# Allegro board AS2258_ASM235CM_BGA272_V2_0801.brd
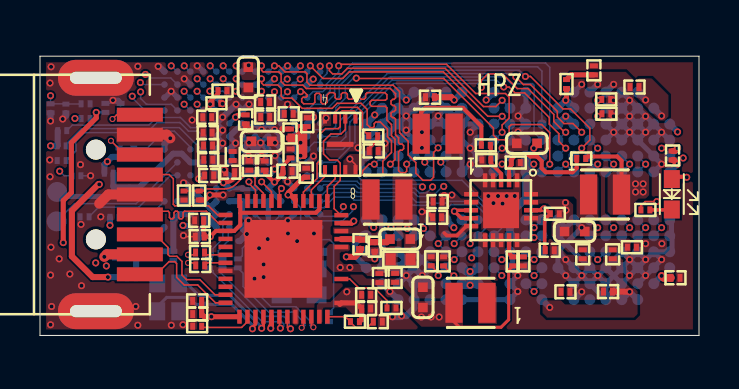
[diagram p0: board, top side]
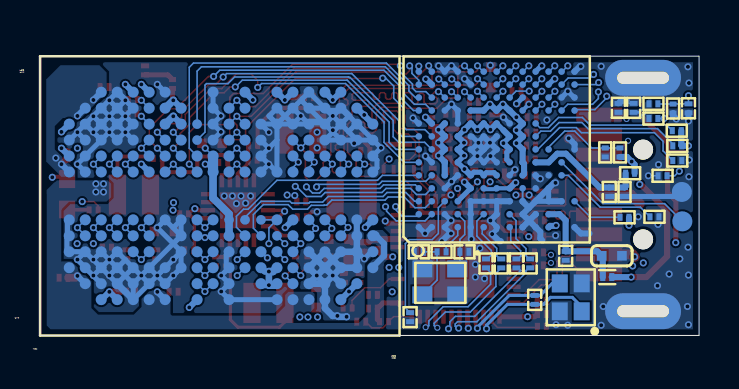
[diagram p1: board, bottom side, seen from below]

Outline 33 x 14 mm; copper layers: TOP, GND2, ART03, ART04, GND5, BOTTOM. Coordinates in mm from the lower left corner of the outline.
Outline path: 0,14 0,0 33,0 33,14 0,14

## Design rules (mm)
constraint set DEFAULT: min track width 0.076
net group DIFF_SATA_RX: nets SATA_RXN SATA_RXP
net group DIFF_SATA_TX: nets SATA_TXN SATA_TXP
net group DIFF_SRX_48: nets SRXN_48 SRXP_48
net group DIFF_STX_48: nets STXN_48 STXP_48
net group DIFF_UD_48: nets UDN_48 UDP_48
net group DIFF_URX_SW_2: nets URXN_SW_2 URXP_SW_2
net group DIFF_UTX_SW_2: nets UTXN_SW_2 UTXP_SW_2
net group DIFF_UTX_SW_2SW: nets UTXN_SW_2SW UTXP_SW_2SW
net group DIFFPAIR0: nets F0_DQS F0_DQSN
net group DIFFPAIR1: nets F1_DQS F1_DQSN

## Placement (name value [footprint] x y rotation side)
C1  100NF/0201  [0201C]  17.78 2.89 270 top
C2  100NF/0201  [0201C]  16.33 1.35 0 top
C3  100NF/0201  [0201C]  7.87 1.73 180 top
C4  10PF/50V  [0201C]  8.23 1.78 270 bottom
C5  100NF/0201  [0201C]  8 4.96 180 top
C6  100NF/0201  [0201C]  17 2.88 270 top
C7  100NF/0201  [0201C]  13.33 8.16 90 top
C8  1UF/10V  [0201C]  16.91 0.69 180 top
C9  100NF/0201  [0201C]  16.33 2.04 0 top
C10  4.7uF/10V  [0201C]  16.03 4.58 90 top
C11  10UF/6.3V  [0402C]  18.03 4.83 270 top
C12  2.2UF/10V  [0201C]  4.04 11.41 90 bottom
C13  100NF/0201  [0201C]  7.87 1.07 0 top
C14  100NF/0201  [0201C]  7.97 5.77 0 top
C15  100NF/0201  [0201C]  10.67 3.61 90 bottom
C16  100NF/0201  [0201C]  9.9 3.61 90 bottom
C17  100NF/0201  [0201C]  9.14 3.61 90 bottom
C18  100NF/0201  [0201C]  8.46 3.61 90 bottom
C19  100NF/0201  [0201C]  8.02 3.51 0 top
C20  100NF/0201  [0201C]  8.02 4.16 0 top
C21  22UF/16V/0402  [0402C]  26.77 5.21 90 top
C22  0.1UF/16V  [0201C]  3.27 11.41 270 bottom
C23  1UF/16V  [0201C]  0.53 11.39 270 bottom
C24  100NF/0201  [0201C]  16.71 9.25 0 top
C25  20PF/0201  [0201C]  11.75 4.19 180 bottom
C26  20PF/0201  [0201C]  14.03 4.19 0 bottom
C27  2.2uF  [0201C]  19.91 6.71 180 top
C28  2.2UF/0402  [0201C]  14.47 0.92 270 bottom
C29  1uF  [0201C]  25.52 4.27 0 top
C30  10uF  [0402C]  19.17 1.91 180 top
C31  10uF  [0402C]  11.1 9.73 270 top
C32  4.7UF/0402  [0201C]  10.49 8.51 90 top
C33  100NF/0201  [0201C]  9.52 8.18 180 top
C34  10uF  [0402C]  10.43 12.94 180 top
C35  4.7UF/0402  [0201C]  11.25 8.51 90 top
C36  100NF/0201  [0201C]  12.39 8.23 0 top
C37  100NF/0201_NC  [0201C]  12.45 11.11 0 top
C38  100NF/0201_NC  [0201C]  8.42 9.52 180 top
C39  10UF/0402  [0402C]  4.37 3.99 90 bottom
C40  100NF/0201  [0201C]  6.68 3.99 270 bottom
C41  100NF/0201_NC  [0201C]  12.52 10.12 270 top
C42  100NF/0201_NC  [0201C]  31.67 9.02 270 top
C43  100NF/0201_NC  [0201C]  28.67 4.07 270 top
C44  100NF/0201_NC  [0201C]  28.44 2.2 0 top
C45  100NF/0201_NC  [0201C]  27.18 4.07 270 top
C46  100NF/0201_NC  [0201C]  29.77 12.45 0 top
C47  2.2UF/0402  [0402C]  24.38 9.63 270 top
C48  2.2UF/0402  [0201C]  4.49 7.19 270 bottom
CB1  100nF  [0201C]  19.89 5.92 180 top
CB2  100nF  [0201C]  8.47 8.02 0 top
CB3  100nF  [0201C]  8.43 8.81 0 top
CB4  100nF  [0201C]  10.3 10.83 90 top
CB5  100nF  [0201C]  11.28 10.95 0 top
CB6  100nF  [0201C]  11.27 11.7 0 top
CB7  100nF  [0201C]  8.38 10.94 180 top
CB8  100nF  [0201C]  8.4 10.17 180 top
CB9  100nF  [0201C]  26.31 2.19 180 top
CB10  100nF  [0201C]  27.73 13.29 90 top
CB11  100nF  [0201C]  19.53 11.94 180 top
CB12  100nF  [0201C]  31.82 2.89 0 top
FB1  120 OHM 2A\0 OHM  [0603L]  9.65 9 270 top
FB2  120 OHM 2A\0 OHM  [0603L]  12.55 9.12 270 top
FB3  120 OHM 2A\0 OHM  [0603L]  4.6 2.93 0 bottom
J1  USB30_typeA  [USBA-12D00X18D9]  5 7.07 270 top
JP1  HEADER_2P  [TP4]  0.84 5.72 180 bottom
JP2  HEADER_2P  [TP4]  0.86 7.19 180 bottom
L1  4.7uH  [IND_VLS252010]  17.4 6.81 180 top
L2  GNR3015PM-3.3UH  [IND_VLS252010]  21.56 1.64 180 top
L3  GNR3015PM-3.3UH  [IND_VLS252010]  19.91 10.11 180 top
L4  GNR3015PM-3.3UH  [IND_VLS252010]  28.29 7.07 0 top
LED1  BLUE  [LED_2P_63X31_H16]  31.64 7.08 270 top
R1  1KOhm  [0201R-S]  30.31 6.29 0 top
R2  100KOhm  [0201R]  15.77 0.69 0 top
R3  12.1KOHM  [0201R]  7.87 0.46 180 top
R7  4.7KOhm  [0201R]  17.6 1.38 0 top
R8  47KOHM  [0201R]  2.28 11.61 0 bottom
R9  4.7KOhm  [0201R]  16.69 10.01 0 top
R10  100KOhm  [0201R]  1.3 11.38 90 bottom
R11  5.1K/0201  [0201R]  1.83 8.01 180 bottom
R13  510K  [0201R]  25.78 6.1 180 top
R14  453K  [0201R]  23.67 3.71 270 top
R15  90.9K  [0201R]  22.32 9.53 180 top
R16  100K  [0201R]  24.2 3.71 270 top
R17  100K  [0201R]  22.35 8.79 180 top
R19  200K  [0201R]  27.1 8.87 0 top
R20  100K  [0201R]  23.82 8.67 0 top
R21  2.4K/0201  [0201R]  9.14 12.27 180 top
R22  2.4K/0201  [0201R]  8.84 11.64 0 top
R23  2.4K/0201  [0201R]  26.36 12.6 270 top
R24  10K/0402  [0201R]  3.45 8.13 0 bottom
R25  100K/0201_NC  [0201R]  3.96 9.17 90 bottom
R26  100K/0201  [0201R]  4.7 9.17 270 bottom
R27  100K/0402  [0201R]  3.73 7.19 270 bottom
R28  100K/0201  [0201R]  1.09 9.5 0 bottom
R29  100K/0201  [0201R]  1.12 10.27 0 bottom
R30  100K/0201  [0201R]  1.09 8.77 180 bottom
R31  100K/0201  [0201R]  2.23 5.95 180 bottom
R32  100K/0201  [0201R]  3.73 5.92 0 bottom
R33  300/0201  [0201R]  20.21 3.71 90 top
R34  300/0201  [0201R]  28.35 11.83 180 top
R35  300/0201  [0201R]  19.59 3.72 90 top
R36  300/0201  [0201R]  28.36 11.11 180 top
R37  0/0402  [0201R]  12.89 4.19 180 bottom
R38  0/0402  [0201R]  13.38 10.69 270 top
R39  0/0402  [0201R]  2.28 10.88 180 bottom
R40  0Ohm  [0402R]  18.06 3.81 0 top
R41  0/0402  [0201R]  16.76 4.45 90 top
R42  0/0402  [0201R]  29.64 4.42 180 top
R43  47K/0201  [0201R]  7.97 7.01 270 top
R44  5.1K/0201  [0201R]  7.21 7.01 90 top
U3  W25X20CL USON(2x3mm)  [USON8_200X300H060]  15.03 9.58 180 top
U4  BGA169  [AS2258_9X9X1_2]  10.13 9.33 90 bottom
U5  RY1303  [QFN20_0R4]  23.09 6.28 270 top
U6  TMP_5  [BGA272_0R55]  24.61 7.04 90 bottom
U7  ASM235CM  [WD_QFN_48P_16_S236_PAD_12V]  12.19 3.84 270 top
X1  25Mhz  [XTAL_4P_126X98_HELE_H31]  6.42 1.91 90 bottom
Y1  30MHz-2520  [XTAL2520]  11.5 3.54 0 bottom

## Library data of the parts
C1-C14 C19-C24 = C
C15-C18 C25 C26 C29 C33 C36-C38 C40-C48 = C0402_0
C27 C30 C31 C34 C35 = C0603_0
C28 CB1-CB12 = C0402_1
C32 C39 = C0603_1
FB1-FB3 = FB0603_1
J1 = USB30 connector_2
JP1 JP2 = HEADER_0: alternate symbols: (tp4)
L1 = INDUCTOR
L2-L4 = GNR3015PM-3R3M_0
LED1 = LED_0
R1-R3 R7-R10 = R_0
R11 R43 R44 = R
R13-R17 R19-R42 = R0402_0
U3 = AT25HP512_0
U4 = AS2258_BGA169_3
U5 = UC1846_4: User Part Number: #PRT; Tolerance: #TOL
U6 = TMP_8: User Part Number: #PRT; Tolerance: #TOL
U7 = ASM1053_8: Tolerance: #TOL; User Part Number: #PRT
X1 = CRYSTAL_SMD_24GND
Y1 = XTAL-FXQM-090017_0

## Footprints (pads in the part's own frame, mm; a bottom-side part is the same pattern mirrored in y, then rotated)
0201C
  rect 0.25x0.4 smd: 1(-0.225,0) 2(0.225,0)
0201R
  rect 0.25x0.35 smd: 1(-0.225,0) 2(0.225,0)
0201R-S
  rect 0.25x0.35 smd: 1(-0.225,0) 2(0.225,0)
0402C
  rect 0.483x0.483 smd: 1(0,0.508) 2(0,-0.508)
0402R
  rect 0.508x0.61 smd: 1(-0.5,0) 2(0.5,0)
0603L
  rect 0.25x0.4 smd: 1(-0.225,0) 2(0.225,0)
AS2258_9X9X1_2
  round 0.33 smd: A1(-3.9,3.9) A2(-3.25,3.9) A3(-2.6,3.9) A4(-1.95,3.9) A5(-1.3,3.9) A6(-0.65,3.9) A7(0,3.9) A8(0.65,3.9) A9(1.3,3.9) A10(1.95,3.9) A11(2.6,3.9) A12(3.25,3.9) A13(3.9,3.9) B1(-3.9,3.25) B2(-3.25,3.25) B3(-2.6,3.25) B4(-1.95,3.25) B5(-1.3,3.25) B6(-0.65,3.25) B7(0,3.25) B8(0.65,3.25) B9(1.3,3.25) B10(1.95,3.25) B11(2.6,3.25) B12(3.25,3.25) B13(3.9,3.25) C1(-3.9,2.6) C2(-3.25,2.6) C3(-2.6,2.6) C4(-1.95,2.6) C5(-1.3,2.6) C6(-0.65,2.6) C7(0,2.6) C8(0.65,2.6) C9(1.3,2.6) C10(1.95,2.6) C11(2.6,2.6) C12(3.25,2.6) C13(3.9,2.6) D1(-3.9,1.95) D2(-3.25,1.95) D3(-2.6,1.95) D5(-1.3,1.95) D6(-0.65,1.95) D7(0,1.95) D8(0.65,1.95) D9(1.3,1.95) D10(1.95,1.95) D11(2.6,1.95) D12(3.25,1.95) D13(3.9,1.95) E1(-3.9,1.3) E2(-3.25,1.3) E3(-2.6,1.3) E4(-1.95,1.3) E5(-1.3,1.3) E6(-0.65,1.3) E7(0,1.3) E8(0.65,1.3) E9(1.3,1.3) E10(1.95,1.3) E11(2.6,1.3) E12(3.25,1.3) E13(3.9,1.3) F1(-3.9,0.65) F2(-3.25,0.65) F3(-2.6,0.65) F4(-1.95,0.65) F5(-1.3,0.65) F6(-0.65,0.65) F7(0,0.65) F8(0.65,0.65) F9(1.3,0.65) F10(1.95,0.65) F11(2.6,0.65) F12(3.25,0.65) F13(3.9,0.65) G1(-3.9,0) G2(-3.25,0) G3(-2.6,0) G4(-1.95,0) G5(-1.3,0) G6(-0.65,0) G7(0,0) G8(0.65,0) G9(1.3,0) G10(1.95,0) G11(2.6,0) G12(3.25,0) G13(3.9,0) H1(-3.9,-0.65) H2(-3.25,-0.65) H3(-2.6,-0.65) H4(-1.95,-0.65) H5(-1.3,-0.65) H6(-0.65,-0.65) H7(0,-0.65) H8(0.65,-0.65) H9(1.3,-0.65) H10(1.95,-0.65) H11(2.6,-0.65) H12(3.25,-0.65) H13(3.9,-0.65) J1(-3.9,-1.3) J2(-3.25,-1.3) J3(-2.6,-1.3) J4(-1.95,-1.3) J5(-1.3,-1.3) J6(-0.65,-1.3) J7(0,-1.3) J8(0.65,-1.3) J9(1.3,-1.3) J10(1.95,-1.3) J11(2.6,-1.3) J12(3.25,-1.3) J13(3.9,-1.3) K1(-3.9,-1.95) K2(-3.25,-1.95) K3(-2.6,-1.95) K4(-1.95,-1.95) K5(-1.3,-1.95) K6(-0.65,-1.95) K7(0,-1.95) K8(0.65,-1.95) K9(1.3,-1.95) K10(1.95,-1.95) K11(2.6,-1.95) K12(3.25,-1.95) K13(3.9,-1.95) L1(-3.9,-2.6) L2(-3.25,-2.6) L3(-2.6,-2.6) L4(-1.95,-2.6) L5(-1.3,-2.6) L7(0,-2.6) L10(1.95,-2.6) L11(2.6,-2.6) L12(3.25,-2.6) L13(3.9,-2.6) M3(-2.6,-3.25) M5(-1.3,-3.25) M6(-0.65,-3.25) M10(1.95,-3.25) M11(2.6,-3.25) M12(3.25,-3.25) M13(3.9,-3.25) N1(-3.9,-3.9) N3(-2.6,-3.9) N7(0,-3.9) N10(1.95,-3.9) N11(2.6,-3.9) N12(3.25,-3.9) N13(3.9,-3.9)
BGA272_0R55
  round 0.55 smd: AA4(-3.645,-8.278) AA5(-2.845,-8.278) AA6(-2.045,-8.278) AA7(-1.245,-8.278) AA10(1.155,-8.278) AA11(1.955,-8.278) AA12(2.755,-8.278) AA13(3.555,-8.278) B4(-3.645,6.922) B5(-2.845,6.922) B6(-2.045,6.922) B7(-1.245,6.922) B10(1.155,6.922) B11(1.955,6.922) B12(2.755,6.922) B13(3.555,6.922) C3(-4.445,6.122) C4(-3.645,6.122) C5(-2.845,6.122) C6(-2.045,6.122) C7(-1.245,6.122) C10(1.155,6.122) C11(1.955,6.122) C12(2.755,6.122) C13(3.555,6.122) C14(4.355,6.122) D2(-5.245,5.322) D3(-4.445,5.322) D4(-3.645,5.322) D5(-2.845,5.322) D6(-2.045,5.322) D7(-1.245,5.322) D10(1.155,5.322) D11(1.955,5.322) D12(2.755,5.322) D13(3.555,5.322) D14(4.355,5.322) D15(5.155,5.322) E2(-5.245,4.522) E3(-4.445,4.522) E4(-3.645,4.522) E5(-2.845,4.522) E6(-2.045,4.522) E7(-1.245,4.522) E10(1.155,4.522) E11(1.955,4.522) E12(2.755,4.522) E13(3.555,4.522) E14(4.355,4.522) E15(5.155,4.522) F2(-5.245,3.722) F3(-4.445,3.722) F4(-3.645,3.722) F5(-2.845,3.722) F6(-2.045,3.722) F7(-1.245,3.722) F10(1.155,3.722) F11(1.955,3.722) F12(2.755,3.722) F13(3.555,3.722) F14(4.355,3.722) F15(5.155,3.722) G2(-5.245,2.922) G3(-4.445,2.922) G4(-3.645,2.922) G5(-2.845,2.922) G6(-2.045,2.922) G7(-1.245,2.922) G10(1.155,2.922) G11(1.955,2.922) G12(2.755,2.922) G13(3.555,2.922) G14(4.355,2.922) G15(5.155,2.922) H2(-5.245,2.122) H3(-4.445,2.122) H4(-3.645,2.122) H7(-1.245,2.122) H10(1.155,2.122) H11(1.955,2.122) H12(2.755,2.122) H13(3.555,2.122) H14(4.355,2.122) H15(5.155,2.122) J4(-3.645,1.322) J5(-2.845,1.322) J6(-2.045,1.322) J7(-1.245,1.322) J10(1.155,1.322) J11(1.955,1.322) J12(2.755,1.322) J13(3.555,1.322) J14(4.355,1.322) K2(-5.245,0.522) K3(-4.445,0.522) K4(-3.645,0.522) K5(-2.845,0.522) K6(-2.045,0.522) K7(-1.245,0.522) K10(1.155,0.522) K11(1.955,0.522) L3(-4.445,-0.278) L4(-3.645,-0.278) L5(-2.845,-0.278) L6(-2.045,-0.278) L7(-1.245,-0.278) L10(1.155,-0.278) L11(1.955,-0.278) L12(2.755,-0.278) L13(3.555,-0.278) L14(4.355,-0.278) L15(5.155,-0.278) M2(-5.245,-1.078) M3(-4.445,-1.078) M4(-3.645,-1.078) M5(-2.845,-1.078) M6(-2.045,-1.078) M10(1.155,-1.078) M11(1.955,-1.078) M12(2.755,-1.078) M13(3.555,-1.078) M14(4.355,-1.078) N4(-3.645,-1.878) N5(-2.845,-1.878) N6(-2.045,-1.878) N10(1.155,-1.878) N11(1.955,-1.878) N12(2.755,-1.878) N13(3.555,-1.878) N14(4.355,-1.878) N15(5.155,-1.878) P3(-4.445,-2.678) P4(-3.645,-2.678) P5(-2.845,-2.678) P10(1.155,-2.678) P11(1.955,-2.678) P12(2.755,-2.678) P13(3.555,-2.678) R2(-5.245,-3.478) R3(-4.445,-3.478) R4(-3.645,-3.478) R5(-2.845,-3.478) R7(-1.245,-3.478) R10(1.155,-3.478) R13(3.555,-3.478) R14(4.355,-3.478) R15(5.155,-3.478) T2(-5.245,-4.278) T3(-4.445,-4.278) T4(-3.645,-4.278) T5(-2.845,-4.278) T6(-2.045,-4.278) T7(-1.245,-4.278) T10(1.155,-4.278) T11(1.955,-4.278) T12(2.755,-4.278) T13(3.555,-4.278) T14(4.355,-4.278) T15(5.155,-4.278) U2(-5.245,-5.078) U3(-4.445,-5.078) U4(-3.645,-5.078) U5(-2.845,-5.078) U6(-2.045,-5.078) U7(-1.245,-5.078) U10(1.155,-5.078) U11(1.955,-5.078) U12(2.755,-5.078) U13(3.555,-5.078) U14(4.355,-5.078) U15(5.155,-5.078) V2(-5.245,-5.878) V3(-4.445,-5.878) V4(-3.645,-5.878) V5(-2.845,-5.878) V6(-2.045,-5.878) V7(-1.245,-5.878) V10(1.155,-5.878) V11(1.955,-5.878) V12(2.755,-5.878) V13(3.555,-5.878) V14(4.355,-5.878) V15(5.155,-5.878) W2(-5.245,-6.678) W3(-4.445,-6.678) W4(-3.645,-6.678) W5(-2.845,-6.678) W6(-2.045,-6.678) W7(-1.245,-6.678) W10(1.155,-6.678) W11(1.955,-6.678) W12(2.755,-6.678) W13(3.555,-6.678) W14(4.355,-6.678) W15(5.155,-6.678) Y3(-4.445,-7.478) Y4(-3.645,-7.478) Y5(-2.845,-7.478) Y6(-2.045,-7.478) Y7(-1.245,-7.478) Y10(1.155,-7.478) Y11(1.955,-7.478) Y12(2.755,-7.478) Y13(3.555,-7.478) Y14(4.355,-7.478)
  round 0.48 smd: K12(2.755,0.522) K13(3.555,0.522) M7(-1.245,-1.078) N7(-1.245,-1.878) P6(-2.045,-2.678) P7(-1.245,-2.678) R6(-2.045,-3.478)
IND_VLS252010
  rect 0.864x2.007 smd: 1(-0.826,0) 2(0.826,0)
LED_2P_63X31_H16
  rect 0.899x0.8 smd: 1(-0.762,0) 2(0.762,0)
QFN20_0R4
  rect 0.7x0.223 smd: 1(-1.5,0.8) 2(-1.5,0.4) 3(-1.5,0) 4(-1.5,-0.4) 5(-1.5,-0.8) 11(1.5,-0.8) 12(1.5,-0.4) 13(1.5,0) 14(1.5,0.4) 15(1.5,0.8)
  rect 0.223x0.7 smd: 6(-0.8,-1.5) 7(-0.4,-1.5) 8(0,-1.5) 9(0.4,-1.5) 10(0.8,-1.5) 17(0.4,1.5) 18(0,1.5) 19(-0.4,1.5) 20(-0.8,1.5)
  rect 1.8x1.8 smd: 21(0,0)
TP4
  round 1.001 smd: 1(0,0)
USBA-12D00X18D9
  round 1 hole 1 unplated: (-2.25,-2.2) (2.25,-2.2)
  rect 0.7x2.3 smd: 1(3,0) 2(1,0) 3(-1,0) 4(-3,0) 5(-4,0) 6(-2,0) 7(0,0) 8(2,0) 9(4,0)
  oval 1.8x3.8 hole 0.6x2.6: 10(-5.85,-2.2) 11(5.85,-2.2)
USON8_200X300H060
  rect 0.203x0.457 smd: 1(-0.762,-1.27) 2(-0.254,-1.27) 3(0.254,-1.27) 4(0.762,-1.27) 5(0.762,1.27) 6(0.254,1.27) 7(-0.254,1.27) 8(-0.762,1.27)
  rect 1.321x0.254 smd: 9(0,0)
WD_QFN_48P_16_S236_PAD_12V
  rect 0.7x0.223 smd: 1(-2.9,2.2) 2(-2.9,1.8) 3(-2.9,1.4) 4(-2.9,1) 5(-2.9,0.6) 7(-2.9,-0.2) 8(-2.9,-0.6) 9(-2.9,-1) 10(-2.9,-1.4) 11(-2.9,-1.8) 12(-2.9,-2.2) 25(2.9,-2.2) 26(2.9,-1.8) 27(2.9,-1.4) 28(2.9,-1) 29(2.9,-0.6) 30(2.9,-0.2) 31(2.9,0.2) 32(2.9,0.6) 33(2.9,1) 34(2.9,1.4) 35(2.9,1.8) 36(2.9,2.2)
  rect 0.223x0.7 smd: 13(-2.2,-2.9) 14(-1.8,-2.9) 15(-1.4,-2.9) 16(-1,-2.9) 17(-0.6,-2.9) 18(-0.2,-2.9) 19(0.2,-2.9) 20(0.6,-2.9) 21(1,-2.9) 22(1.4,-2.9) 23(1.8,-2.9) 24(2.2,-2.9) 37(2.21,2.9) 40(1.01,2.9) 44(-0.59,2.9) 45(-0.99,2.9) 46(-1.39,2.9) 47(-1.79,2.9) 48(-2.19,2.9)
  rect 3.9x3.9 smd: 49(0,0)
XTAL2520
  rect 1x0.85 smd: 1(0.6,0.2) 2(2.35,0.2) 3(2.35,1.5) 4(0.6,1.5)
XTAL_4P_126X98_HELE_H31
  rect 0.9x0.8 smd: 1(-0.7,-0.55) 2(0.7,-0.55) 3(0.7,0.55) 4(-0.7,0.55)

## Nets
+2.5V_48: C2.1 C5.1 C9.1 C14.2 C24.1 LED1.1 R2.2 R9.2 U3.7 U3.8 U7.2 U7.12 U7.15 U7.35 U7.37
+5V: C12.1 C22.2 J1.1(VBUS) R8.2 R39.1 R42.1 R43.2 U7.11
+VDD_48: C1.1 C3.1 C6.1 C7.1 C13.2 R40.1 U7.5 U7.25 U7.29 U7.44
+VDDO_48: C11.1 L1.1 R40.2
AVCC1V1: C31.1 C37.1 C41.1 CB4.1 FB1.1 FB2.1 FB3.1 L3.2 R15.2 U4.D6 U4.D7 U4.D8 U4.E5 U4.E9 U4.F5 U4.F9 U4.G5 U4.G9 U4.H6 U4.H7 U4.H8
AVDD_PLL_1V1: C39.1 C40.1 FB3.2 U4.L2
AVDDI_REG_IN: C28.1 U4.C3
AVDDP_SATA_1V1: C35.1 C36.1 FB2.2 U4.D3 U4.E4
AVDDQ_DDR_3V3: C41.2 R38.2 U4.C5 U4.C6 U4.C7 U4.C8 U4.C9
AVDDT_SATA_1V1: C32.1 C33.1 FB1.2 U4.F4 U4.G4 U4.H4
GND: C1.2 C2.2 C3.2 C5.2 C6.2 C7.2 C8.1 C9.2 C12.2 C13.1 C14.1 C21.2 C22.1 C23.2 C24.2 C25.2 C26.2 C27.2 C28.2 C29.2 C30.2 C31.2 C32.2 C33.2 C34.2 C35.2 C36.2 C39.2 C40.2 C47.2 C48.2 CB1.2 CB2.2 CB3.2 CB4.2 CB5.2 CB6.2 CB7.2 CB8.2 CB9.2 CB10.2 CB11.2 CB12.2 J1.4 J1.7 J1.10 J1.11 JP2.1 R3.2 R7.2 R10.1 R11.1 R16.2 R17.2 R20.2 R22.2 R26.2 R27.2 R30.2 R31.2 R33.2 R34.1 R35.2 R36.1 R41.1 R44.1 U3.4 U3.9 U4.A1 U4.A9 U4.A13 U4.B1 U4.B6 U4.C1 U4.C2 U4.C4 U4.C10 U4.C13 U4.D5 U4.D9 U4.D10 U4.D13 U4.E1 U4.E2 U4.E3 U4.E6 U4.E7 U4.E8 U4.E12 U4.F3 U4.F6 U4.F7 U4.F8 U4.G1 U4.G2 U4.G3 U4.G6 U4.G7 U4.G8 U4.H3 U4.H5 U4.H9 U4.J1 U4.J2 U4.J3 U4.J4 U4.J11 U4.K1 U4.K2 U4.K3 U4.K13 U4.L3 U4.L4 U4.L12 U4.M3 U4.M11 U4.N1 U4.N7 U4.N11 U4.N13 U5.1 U5.4 U5.5 U5.12 U5.13 U5.15 U5.17 U5.21 U6.AA5 U6.AA10 U6.AA11 U6.AA12 U6.B5 U6.B6 U6.B7 U6.B12 U6.C4 U6.C5 U6.C10 U6.C11 U6.C12 U6.C13 U6.D3 U6.D4 U6.D5 U6.D12 U6.D13 U6.D14 U6.E3 U6.E4 U6.E5 U6.E12 U6.E13 U6.E14 U6.E15 U6.F2 U6.F3 U6.F4 U6.F12 U6.F13 U6.F14 U6.G3 U6.G4 U6.H3 U6.H4 U6.H7 U6.H15 U6.J4 U6.J5 U6.J6 U6.J7 U6.L12 U6.L13 U6.L14 U6.L15 U6.M2 U6.M3 U6.M4 U6.M5 U6.P10 U6.P11 U6.P12 U6.P13 U6.R2 U6.R10 U6.R13 U6.R14 U6.T13 U6.T14 U6.U3 U6.U4 U6.U5 U6.U13 U6.U14 U6.U15 U6.V2 U6.V3 U6.V4 U6.V5 U6.V12 U6.V13 U6.V14 U6.W3 U6.W4 U6.W5 U6.W12 U6.W13 U6.W14 U6.Y4 U6.Y5 U6.Y6 U6.Y7 U6.Y12 U6.Y13 U7.20 U7.32 U7.49 X1.2 X1.4(GND2) Y1.2 Y1.4(GND0)
PGND_48: C10.2 C11.2 R41.2 U7.45
VBUS_DET_48: C23.1 R8.1 R10.2 U7.10
VCC3V3: C30.1 C37.2 C38.2 C42.2 C43.2 C44.2 C45.2 C46.2 CB2.1 CB3.1 L2.2 R14.2 R24.1 R25.1 R28.1 R29.1 R32.1 R38.1 U4.B9 U4.K4 U4.K5 U4.L1 U4.L5 U6.AA7 U6.B10 U6.C14 U6.D2 U6.D15 U6.E2 U6.K2 U6.N15 U6.V15 U6.W2 U6.W15 U6.Y3
VCC5IN_48: C10.1 R39.2 U7.47
DC5V: C21.1 C27.1 C43.1 C45.1 CB1.1 R13.1 R42.2 U5.7 U5.10 U5.19(VIN3)
EX_RESETN: C48.1 R24.2 R27.1 U4.K6
F0_ALE: U4.L10 U6.K4 U6.L4
F0_CE0N: U4.A11 U6.K11
F0_CE1N: U4.A10 U6.H11
F0_CE2N: U4.B10 U6.K13
F0_CE3N: U4.A8 U6.H12
F0_CE4N: U4.B8 U6.K10
F0_CE5N: U4.A7 U6.J11
F0_CE6N: U4.B7 U6.K12
F0_CE7N: U4.A6 U6.J12
F0_CLE: U4.K10 U6.K5 U6.L5
F0_DQS: U4.N10 U6.F6 U6.F7
F0_DQSN: U4.M10 U6.G6 U6.G7
F0_IO0: U4.K11 U6.C6 U6.C7
F0_IO1: U4.L11 U6.D6 U6.D7
F0_IO2: U4.H11 U6.E6 U6.E7
F0_IO3: U4.J13 U6.F5 U6.G5
F0_IO4: U4.H13 U6.D10 U6.D11
F0_IO5: U4.G13 U6.E10 U6.E11
F0_IO6: U4.G11 U6.F10 U6.F11
F0_IO7: U4.G12 U6.G11 U6.G12
F0_RE: U4.N12 U6.K7 U6.L7
F0_REN: U4.M12 U6.K6 U6.L6
F0_WEN: U4.H12 U6.H10 U6.J10
F1_ALE: U4.B13 U6.M13 U6.N13
F1_CE0N: U4.A5 U6.N6
F1_CE1N: U4.B5 U6.R6
F1_CE2N: U4.A4 U6.N4
F1_CE3N: U4.B4 U6.R5
F1_CE4N: U4.A3 U6.N7
F1_CE5N: U4.B3 U6.P6
F1_CE6N: U4.A2 U6.N5
F1_CE7N: U4.B2 U6.P5
F1_CLE: U4.B11 U6.M12 U6.N12
F1_DQS: U4.J12 U6.U10 U6.U11
F1_DQSN: U4.K12 U6.T10 U6.T11
F1_IO0: U4.F12 U6.Y10 U6.Y11
F1_IO1: U4.C11 U6.W10 U6.W11
F1_IO2: U4.F13 U6.V10 U6.V11
F1_IO3: U4.E13 U6.T12 U6.U12
F1_IO4: U4.C12 U6.W6 U6.W7
F1_IO5: U4.D12 U6.V6 U6.V7
F1_IO6: U4.F11 U6.U6 U6.U7
F1_IO7: U4.E11 U6.T5 U6.T6
F1_RE: U4.L13 U6.M10 U6.N10
F1_REN: U4.M13 U6.M11 U6.N11
F1_WEN: U4.D11 U6.P7 U6.R7
F_R/B: R23.2 U4.B12 U6.H13 U6.H14 U6.J13 U6.J14 U6.P3 U6.P4 U6.R3 U6.R4
F_WPN: U4.A12 U6.K3 U6.L3 U6.M14 U6.N14
FB1: R14.1 R16.1 U5.14
FB2: R15.1 R17.1 U5.3
FB3: R19.1 R20.1 U5.2
FVCCQ: C34.1 C38.1 C42.1 C44.1 C46.1 CB5.1 CB6.1 CB7.1 CB8.1 CB9.1 CB10.1 CB11.1 CB12.1 L4.2 R19.2 R21.1 R23.1 U4.E10 U4.F10 U4.G10 U4.H10 U4.J5 U4.J6 U4.J7 U4.J8 U4.J9 U6.AA4 U6.AA6 U6.AA13 U6.B4 U6.B11 U6.B13 U6.C3 U6.F15 U6.G2 U6.G10 U6.G15 U6.H2 U6.R15 U6.T2 U6.T7 U6.T15 U6.U2 U6.Y14
GPIO2_48: R1.1 U7.7
GPIO4_48: U3.1 U7.4
GPIO5_48: U3.5 U7.3
GPIO_2: JP1.1 U4.M6
GPIO_3: R25.2 R26.1 U4.L7
GPIO_6: R28.2 U4.K8
GPIO_7: R29.2 U4.K9
GPIO_9: R30.1 U4.K7
GPIO_10: R31.1 U4.M5
GPIO_13: R32.2 U4.N3
I2C_CLK_48: U3.6 U7.1
I2C_DATA_48: U3.2 U7.48
LXI_48: L1.2 U7.46
RST_48: C8.2 R2.1 U7.36
SATA_RXN: C16.2 U4.F1
SATA_RXP: C15.2 U4.F2
SATA_TXN: C17.2 U4.H1
SATA_TXP: C18.2 U4.H2
SRXN_48: C17.1 U7.31
SRXP_48: C18.1 U7.30
STXN_48: C16.1 U7.33
STXP_48: C15.1 U7.34
SW1: L2.1 U5.11
SW2: L3.1 U5.6
SW3: L4.1 U5.20
TEST_EN_48: R7.1 U7.40
UDN_48: J1.2 U7.14
UDP_48: J1.3 U7.13
UFP_CC1_SW: R11.2 U7.8
UFP_CC2_SW: R43.1 R44.2 U7.9
UREXT_48: R3.1 U7.26
URXN_SW_2: J1.8 U7.23
URXP_SW_2: J1.9 U7.24
UTXN_SW_2: C20.1 J1.5
UTXN_SW_2SW: C20.2 U7.18
UTXP_SW_2: C19.1 J1.6
UTXP_SW_2SW: C19.2 U7.19
VREFQ: C47.1 R21.2 R22.1 U4.J10(VREFQ) U6.L10 U6.L11 U6.M6 U6.M7
WP#_48: R9.1 U3.3(WP#)
XI_48: C4.2 U7.27 X1.1
XO_48: C4.1 U7.28 X1.3
XTAL_I: C25.1 U4.D2 Y1.1
XTAL_O: R37.2 U4.D1
N115101: LED1.2 R1.2
N235596: C26.1 R37.1 Y1.3
N243520: R33.1 U6.T3
N243524: R34.2 U6.G14
N243528: R35.1 U6.T4(ZQ_3)
N243548: R36.2 U6.G13
N262079: C29.1 R13.2 U5.8 U5.9 U5.18

Pads without a net: U7 16 17 21 22

## Via types
v1: diameter 0.356, hole 0.203, TOP to BOTTOM, 290 vias
v2: diameter 0.305, hole 0.203, TOP to BOTTOM, 6 vias

## Routing (per net, layer and track width the routed paths; a pad name or vN(x,y) marks a point on that pad's centre or on a via; arc(x,y) is an arc through that point)
+2.5V_48: length 51.9
  TOP w0.076: v1(15.52,8.84) 15.8,8.56 U3.8
  TOP w0.178: R9.2 16.91,9.83 16.56,9.48
  TOP w0.203: C14.2 8.2,4.98 C5.1 v1(8.53,4.96) 8.81,5.24 U7.15 9.73,5.24 10.03,5.54 10.03,6.13 ; 10.03,6.13 10.06,6.15 13.82,6.15 13.99,6.33 U7.2 ; 10.03,6.13 10.03,6.7 U7.12 ; v1(32.38,7.93) 32.36,7.95 31.75,7.95 LED1.1
  TOP w0.254: R2.2 16.11,0.8 C2.1 15.83,1.63 U7.37 15.01,1.55
  ART04 w0.203: v1(15.36,2.19) 16.05,2.19 16.89,1.35 24.31,1.35 24.8,0.85 31,0.85 32.38,2.24 v1(32.38,7.93)
  ART04 w0.305: v1(15.52,8.84) 15.52,7.75 ; 15.52,7.75 14.02,6.25 9.83,6.25 v1(8.53,4.96) ; 15.52,7.75 16.18,7.09 16.18,3 v1(15.36,2.19)
+5V: length 14.5
  TOP w0.254: R43.2 8.26,6.79 v1(8.51,7.04) v1(9.17,7.04) ; v1(1.17,4.65) 1.17,6.76 1.57,7.17 1.57,9.66 2.82,10.9 v1(2.82,11.18)
  TOP w0.508: v1(3.22,3.94) 3.35,4.07 J1.1
  ART03 w0.089: v1(3.33,3.48) 3.22,3.59
  ART03 w0.254: v1(3.22,3.94) 3.22,3.38 3.08,3.24 2.12,3.24 1.17,4.19 v1(1.17,4.65)
  BOTTOM w0.127: v1(2.82,11.18) 2.82,11.18 C22.2
  vias: v1(30.33,4.6) v1(31.14,4.6)
+VDD_48: length 18.4
  TOP w0.254: 12.45,7.05 v1(12.42,7.05) ; 12.45,7.05 12.54,7.05 12.79,6.79 U7.5 ; 12.45,7.05 12.45,7.17 13.21,7.93 C7.1 ; C3.1 C13.2 8.23,0.94 v1(8.58,0.94) U7.25 ; U7.29 11.59,0.5 11.55,0.46 v1(11.55,0.36)
  ART03 w0.305: v1(12.42,7.05) 14.81,4.66 14.81,3.64 v1(15.03,3.41) v1(15.52,3.41)
  ART04 w0.305: v1(15.03,3.41) 13.49,1.86 12.37,1.86 11.55,1.05 ; v1(11.55,0.36) 11.55,1.05 ; 11.55,1.05 8.69,1.05 v1(8.58,0.94)
AVCC1V1: length 32.9
  TOP w0.076: 19.1,10.16 19.1,10.14 19.09,10.13 ; 19.1,10.16 19.09,10.15 ; 19.1,10.16 v1(19.12,10.19) 19.1,10.19 19.09,10.18
  TOP w0.203: L3.2 19.09,11.21 19.29,11.41 21.17,11.41 22.1,10.48 R15.2
  TOP w0.254: CB4.1 10.3,10.46 v1(10.45,10.31) ; C41.1 12.13,10.35 12.11,10.37
  TOP w0.305: v1(3.4,2.93) 2.64,2.93 1.6,3.97 1.6,6.25 2.92,7.57 v1(2.97,7.57)
  ART04 w0.305: v1(11.75,8.34) 9.95,8.34 9.5,8.79 6.68,8.79 5.46,7.57 v1(2.97,7.57)
  BOTTOM w0.254: U4.D7 11.77,9.64 v1(11.77,9.66) ; U4.E5 11.28,8.18 10.94,8.18 U4.F5 10.65,8.16 10.26,8.16 U4.G5 ; v1(11.1,10.31) 11.41,10.63 U4.E9 ; U4.H7 9.62,9.18 9.62,8.82 U4.H6 ; v1(10.45,10.31) 10.76,10.63 U4.F9 ; U4.H8 9.48,9.95 v1(9.8,9.64) ; v1(11.77,9.01) 12.08,8.7 U4.D6 11.75,8.34 v1(11.75,8.34) ; 9.8,10.29 U4.G9 ; U4.D8 v1(11.75,10.31)
  BOTTOM w0.305: U4.F9 v1(11.1,10.31) ; U4.E9 v1(11.75,10.31) ; U4.H7 v1(9.8,9.64) ; U4.G9 v1(10.45,10.31) ; U4.D8 v1(11.77,9.66) ; U4.D7 v1(11.77,9.01) ; U4.H8 9.8,10.29 ; FB3.1 v1(3.4,2.93) ; U4.E5 v1(11.75,8.34)
  vias: v1(19.12,9.4)
AVDD_PLL_1V1: length 5.5
  BOTTOM w0.305: FB3.2 4.82,3.94 C39.1 5.1,4.22 C40.1 6.68,5.77 6.98,6.08 U4.L2
AVDDI_REG_IN: length 7.2
  BOTTOM w0.076: U4.C3 13.05,6.41 13.05,5.11 13.36,4.81 14.5,4.81 14.7,4.6 14.7,1.38 C28.1
AVDDP_SATA_1V1: length 3.7
  TOP w0.203: v1(11.75,7.69) 11.72,7.69 11.28,8.13 11.28,8.26 C35.1 ; FB2.2 12.17,8.52 C36.1
  TOP w0.254: C36.1 12.17,8.11 v1(11.75,7.69)
  BOTTOM w0.254: U4.D3 U4.E4
  BOTTOM w0.305: U4.E4 v1(11.75,7.69)
AVDDQ_DDR_3V3: length 3.8
  TOP w0.203: R38.2 13.2,10.47 v1(13.05,10.31)
  BOTTOM w0.305: U4.C9 v1(13.05,10.31) 12.73,10 U4.C8 v1(13.05,9.66) 12.73,9.35 U4.C7 v1(13.05,9.01) 12.73,8.7 U4.C6 U4.C5
AVDDT_SATA_1V1: length 2.7
  TOP w0.203: C33.1 9.75,7.93 9.61,7.79 arc(9.51,7.72) 9.4,7.7 9.22,7.7 v1(9.18,7.66)
  BOTTOM w0.203: U4.H4 U4.G4 10.18,7.33 10.74,7.33 U4.F4
  BOTTOM w0.305: v1(9.18,7.66) 9.2,7.66 U4.H4
GND: length 167.5
  TOP w0.076: C5.2 7.25,4.96 ; v1(2.54,8.01) 2.61,8.08 ; 9.3,8.26 C33.2 9.29,8.18 ; 7.2,5 7.19,5 v1(7.18,5.01)
  TOP w0.178: v1(19.12,6.2) 19.38,6.2 CB1.2
  TOP w0.203: CB4.2 9.91,11.06 v1(9.8,10.94)
  TOP w0.254: R22.2 9.09,11.61 v1(9.14,11.61) ; R41.1 v1(16.76,3.84)
  TOP w0.508: v1(6.53,9.89) 6.35,10.07 J1.4 ; 2.97,6.61 3.43,7.07 J1.7
  GND5 w0.127: v1(23.77,6.99) 24.81,6.99 24.97,6.84 ; 8.94,12.15 8.94,11.82 v1(9.14,11.61)
  BOTTOM w0.076: v1(3.66,11.79) 3.5,11.63 C22.1 ; U4.A13 v1(14.03,13.5) ; 2.46,8.08 2.46,8.08 v1(2.54,8.01) R11.1
  BOTTOM w0.089: U4.J4 U4.J3
  BOTTOM w0.203: v1(9.22,8.31) 9.48,8.05 U4.H5 ; U4.H9 v1(9.8,10.94)
  BOTTOM w0.254: U6.E4 U6.D5 v1(30.32,3.8) ; U6.E4 v1(29.52,3) ; U6.E4 29.12,3.4 28.73,3.79 ; U6.E4 U6.F3 ; 17.55,10.21 U6.W13 18.62,11.28 ; 17.55,10.21 17.17,10.6 U6.Y13 ; 17.55,10.21 U6.Y12 ; 21.13,9.8 U6.R13 ; 21.13,9.8 v1(21.54,9.39) ; 21.13,9.8 U6.R10 21.15,8.2 v1(21.54,8.59) ; U6.R13 U6.T14 ; U6.R13 21.52,10.99 21.52,11 ; U6.R13 U6.P13 21.54,10.2 v1(21.54,10.19) ; U6.R13 21.13,10.61 21.52,11 ; U6.R13 U6.T13 ; U6.J5 U6.J4 ; U6.J5 v1(26.32,3.8) ; U6.J5 U6.F2 U6.F3 ; U6.J5 25.93,4.21 v1(27.12,5.4) U6.H7 U6.J6 ; U6.J4 v1(26.32,3) ; U6.J4 U6.H3 U6.G4 ; U6.Y12 17.13,9.77 v1(17.27,9.63) 17.43,9.8 U6.W12 ; U6.Y12 U6.AA12 16.32,9.8 ; v1(11.05,9.66) 11.05,9.71 U4.F8 ; v1(11.05,9.66) 11.38,9.33 U4.E7 v1(11.1,8.99) U4.F6 10.76,8.68 v1(10.45,8.99) ; v1(11.05,9.66) 11.37,9.98 U4.E8 ; v1(19.94,11) 19.94,10.99 U6.T13 ; v1(19.94,11) U6.U13 U6.T13 ; v1(19.94,11) U6.T14 ; U6.L12 24.33,9.81 v1(23.94,10.2) U6.L13 24.33,10.61 v1(23.94,11) U6.L14 U6.L15 ; U4.A9 14.05,10.63 v1(14.32,10.9) ; 16.32,9.8 v1(15.92,9.4) U6.AA11 16.13,8.79 16.13,8.4 U6.AA10 ; 16.32,9.8 17.52,11 18.24,10.29 v1(18.34,10.29) ; 21.52,11 U6.R14 U6.T13 ; v1(21.54,8.59) 21.93,8.98 U6.P11 v1(21.54,9.39) ; v1(21.54,8.59) U6.P10 ; U6.T14 19.86,11.87 ; U6.D3 U6.C4 30.73,3.41 v1(31.12,3.8) 30.83,4.09 ; v1(18.34,10.29) 18.34,10.19 U6.V12 U6.W12 ; v1(18.34,10.29) 18.43,10.29 ; U4.B6 v1(13.7,8.99) ; U6.J6 U6.J7 26.32,5.4 ; U6.J6 26.32,4.6 ; U6.J6 U6.G4 ; U4.M11 v1(6.57,12.24) 6.25,11.93 U4.N11 ; v1(11.74,12.86) 11.71,12.86 11.43,12.58 U4.E12 ; v1(21.54,9.39) 21.93,9.78 U6.P12 ; v1(31.12,10.19) 31.12,10.2 U6.C13 ; v1(31.12,10.19) U6.C12 ; v1(31.12,10.19) 31.52,9.8 U6.B12 ; 19.86,11.87 19.86,11.72 U6.U14 ; 19.86,11.87 U6.U15 U6.V14 ; U6.U14 U6.V14 ; U6.U14 U6.V13 ; U6.V14 18.62,11.28 ; U6.V14 v1(18.34,11) ; U6.F4 U6.G3 ; U6.F4 28.73,3.79 ; U6.F4 U6.E3 U6.D4 ; U6.Y5 17.12,4.2 v1(16.76,3.84) 16.41,4.2 U6.AA5 ; v1(10.45,8.99) 10.45,9.01 U4.G7 ; v1(10.45,8.99) U4.G6 ; U6.V13 18.43,10.29 ; U6.V13 18.05,11.28 18.62,11.28 ; 18.43,10.29 U6.W12 ; v1(7.87,13.52) 7.9,13.49 7.92,13.49 8.18,13.23 U4.K13 ; U6.E13 U6.F14 v1(28.72,11.79) v1(29.52,10.99) ; U6.E13 U6.D12 ; U6.E13 v1(28.72,10.19) U6.F12 ; U6.E13 v1(29.52,10.99) ; 28.73,3.79 U6.E5 v1(29.52,3.8) U6.D4 ; U6.D12 v1(30.32,10.19) ; U6.D12 U6.C11 30.73,8.98 v1(31.12,8.59) U6.C10 ; v1(30.32,10.19) v1(29.52,10.99) ; v1(30.32,10.19) U6.C13 ; v1(29.52,10.99) U6.D14 ; v1(10.45,5.76) 10.13,5.45 U4.G1 10.13,5.31 v1(10.36,5.08) ; v1(13.04,13.52) 13.02,13.52 U4.C13 12.44,13.52 v1(12.4,13.52) 12.37,13.52 U4.D13 ; U6.G4 v1(27.92,3) U6.F3 ; U6.D14 U6.E15 ; U6.D14 U6.C13 ; JP2.1 1.09,6.97 R27.2 C48.2 ; v1(7.22,12.86) 7.25,12.86 7.53,12.58 U4.L12 ; v1(30.32,10.99) U6.D13 v1(29.52,10.19) U6.E12 U6.F13 v1(28.72,10.99) U6.E14 v1(29.52,11.79) ; U6.B7 31.62,5.71 31.62,5.08 U6.B6 31.65,4.88 31.65,4.31 U6.B5 U6.C5 U6.D4 ; U4.J11 8.83,11.92 v1(9.14,11.61) ; U4.A1 v1(13.72,5.11) 13.4,5.43 U4.B1 ; U6.D4 v1(30.32,3) ; U4.D9 U4.D10 v1(12.4,11.59) 12.71,11.28 U4.C10 ; U6.H15 v1(27.12,12.59) ; U6.R2 U6.M2 23.53,1.81 v1(23.92,2.2) U6.M3 23.53,2.61 v1(23.92,3) U6.M4 23.67,3.53 23.67,4.06 U6.M5 ; v1(11.4,4.83) 11.43,4.86 U4.E1 U4.E2 U4.E3 U4.F3 U4.G3 U4.G2 ; U6.H4 v1(27.12,3) ; U4.L4 U4.L3 U4.K3 ; v1(12.42,5.11) U4.C1 12.73,5.45 v1(12.42,5.76) U4.C2 ; U4.C4 v1(12.4,7.71) U4.D5 ; U4.J1 8.83,5.44 8.2,6.08 U4.K2
  BOTTOM w0.305: U4.M3 U4.L3 ; U4.J1 U4.K2 ; 5.48,5.11 5.92,5.11 U4.N1 ; 7.85,4.75 7.95,4.86 7.95,5.19 U4.K1 U4.J2 8.51,6.39 ; v1(12.88,4.73) 12.49,5.11 v1(12.42,5.11) ; 8.51,6.39 8.83,6.71 U4.J3 ; 8.51,6.39 U4.K3 U4.L4 7.26,7.65 v1(7.19,7.65) ; v1(10.36,5.08) 10.01,4.73 9.93,4.73 ; U6.U4 v1(19.14,3) ; U6.U5 19.14,3.8 ; U4.G2 v1(10.45,5.76) ; U6.V4 v1(18.34,3) ; v1(3.66,11.79) 3.68,11.76 3.91,11.76 C12.2 ; C23.2 v1(0.53,10.75) ; v1(1.14,10.85) 1.3,11.01 R10.1 ; U4.H3 U4.G3 ; U6.Y7 U6.Y6 ; U4.F8 v1(10.47,9.66) U4.G7 ; U4.N7 6.23,9.59 v1(6.53,9.89) ; U4.N13 5.97,13.49 v1(5.92,13.49) ; U4.F7 U4.G8 ; U4.F7 11.05,9.59 v1(11.05,9.66) ; U4.F7 U4.E6
  BOTTOM w0.33: U6.V3 U6.U4 U6.V5 U6.W4 ; U6.V3 U6.W4 ; U6.V3 U6.U3 U6.V4 ; U6.V3 U6.V2 18.73,1.37 18.35,0.98 v1(18.11,0.98) 18.06,0.94 v1(17.65,0.94) 17.66,0.92 ; 17.52,11 17.92,11.4 U6.W14 18.05,11.28 ; U6.V4 U6.W5 U6.Y5 ; U6.V4 U6.U5 ; U6.V4 U6.W3 ; U6.E15 v1(28.72,11.79) ; U6.Y5 U6.Y4 U6.W4 ; U6.Y5 U6.Y6 ; U6.E3 U6.F2 ; 18.83,10.7 19.43,10.7 U6.U13
  vias: v1(0.51,12.65) v1(0.49,8.8) v1(0.51,7.95) v1(0.53,3.03) v1(0.53,0.54) v1(0.56,13.47) v1(0.55,4.42) v1(0.58,1.45) v1(0.96,3.84) v1(1.5,3.08) v1(2.03,8.56) v1(2.06,5.57) v1(2.08,2.49) v1(3.05,5.95) v1(4.8,1.45) v1(4.9,13.49) v1(4.9,0.51) v1(6.58,0.51) v1(7.16,0.54) v1(7.62,10.8) v1(10.45,13.54) v1(10.74,2.85) v1(10.97,4.37) v1(11.2,3.56) v1(11.2,2.93) v1(22.45,6.99) v1(22.71,6.63) v1(22.93,6.99) v1(23.16,6.61) v1(23.37,6.99)
PGND_48: length 2.6
  TOP w0.305: U7.45 16,4.83 C10.2 16.41,4.8 16.54,4.67 R41.2 17.37,4.67 C11.2
VBUS_DET_48: length 18.2
  TOP w0.076: U7.10 10.79,7.29 10.46,7.62 v1(10.46,7.7)
  ART04 w0.089: v1(0.53,12.02) 1.22,12.02 2.16,11.08 2.16,10.29 1.62,9.76 1.62,8.34 2.72,7.24 5.66,7.24 6.91,8.49 8.2,8.49 8.71,7.98 10.18,7.98 v1(10.46,7.7)
  BOTTOM w0.076: v1(0.53,12.02) C23.1 1.29,11.61 R10.2 2.05,11.6 R8.1
VCC3V3: length 33.9
  TOP w0.152: R14.2 23.47,3.28 23.47,0.79 23.09,0.41 21,0.41 20.73,0.68 L2.2
  TOP w0.305: C42.2 31.71,8.8 v1(31.92,8.59) ; C44.2 29.51,2.2 v1(29.52,2.19)
  ART03 w0.254: 31.85,6.02 31.9,5.97 31.9,2.67 31.42,2.19 v1(29.52,2.19)
  ART03 w0.305: v1(13.7,10.94) 14.56,11.8 v1(18.34,11.8) 18.78,12.25 21.55,12.25 21.99,11.8 v1(22.34,11.8)
  BOTTOM w0.305: U6.B10 v1(31.92,8.59) ; R24.1 3.23,8.57 v1(3.38,8.72) 3.61,8.95 R25.1 ; U6.K2 v1(25.52,1.4) ; U6.AA7 16.71,5.42 v1(16.71,5.41) ; R32.1 v1(3.51,5.52) ; U4.L1 7.47,5.49 7.19,5.49 v1(7.16,5.52) ; U6.W15 17.95,12.2 v1(18.34,11.8) U6.V15 ; U6.C14 v1(31.12,11) ; U6.D2 29.92,1.8 v1(29.52,2.19) U6.E2 ; v1(0.53,9.5) R28.1 0.89,9.53 R29.1 ; v1(7.95,7.85) 8.01,7.85 U4.K5 ; U6.D15 v1(30.32,11.8) ; U6.N15 v1(22.34,11.8) ; U6.Y3 v1(17.52,2.2) U6.W2 ; U4.B9 v1(13.7,10.94)
  vias: v1(19.1,0.92) v1(19.58,0.92) v1(19.99,0.92) v1(32.21,8.89)
VCC5IN_48: length 26.2
  TOP w0.254: U7.47 15.61,5.63 v1(15.71,5.74)
  TOP w0.305: v1(15.34,3.94) 15.77,3.94 16.03,4.2 C10.1
  ART03 w0.305: v1(2.79,3.64) 2.3,3.64 1.6,4.34 1.6,10.72 v1(1.75,10.88)
  ART04 w0.305: v1(2.79,3.64) 2.79,2.9 3.2,2.49 5.79,2.49 6.02,2.27 11.2,2.27 12.88,3.94 v1(15.34,3.94)
  ART04 w0.381: v1(15.71,5.74) 15.34,5.36 v1(15.34,3.94)
  BOTTOM w0.076: R39.2 v1(1.75,10.88)
DC5V: length 1.6
  TOP w0.178: U5.10 21.35,5.48 20.88,5.01 20.37,5.01 20.24,5.14
  vias: v1(20.24,7.01) v1(20.62,7.04) v1(26.31,6.66) v1(26.34,6.28)
EX_RESETN: length 6.1
  BOTTOM w0.305: U4.K6 7.53,8.68 7.1,9.11 6.67,9.11 4.97,7.42 C48.1 R27.1 3.68,7.47 R24.2
F0_ALE: length 26.1
  ART03 w0.089: v1(7.22,11.59) 7.63,11.18 7.9,11.18 8.08,11 8.08,9.38 8.76,8.69 9.32,8.69 9.98,8.03 11.62,8.03 11.62,8.03 11.88,8.03 11.88,8.03 13.49,8.03 14.32,7.19 14.32,5.8 15.95,4.17 15.95,3.46 16.61,2.8 17.73,2.8 18.06,2.47 20.09,2.47 20.67,1.88 24.18,1.88 24.36,2.06 24.36,2.39 24.74,2.78 v1(24.74,3)
  BOTTOM w0.076: U6.K4 v1(24.74,3) 24.35,3.4 U6.L4 ; U4.L10 v1(7.22,11.59)
F0_CE0N: length 17.1
  BOTTOM w0.076: U6.K11 25.52,9.39 25.52,13.44 25.31,13.65 15.66,13.65 14.53,12.52 14.53,12.26 14.2,11.93 U4.A11
F0_CE1N: length 17.6
  TOP w0.076: v1(24.31,12.98) 24.56,12.98 26.19,11.36 26.57,11.36 27.53,10.39 27.53,9.79 v1(27.12,9.39)
  BOTTOM w0.076: U4.A10 14.3,11.28 14.98,11.96 14.98,12.51 15.77,13.29 24,13.29 v1(24.31,12.98) ; U6.H11 v1(27.12,9.39)
F0_CE2N: length 15.7
  BOTTOM w0.076: U6.K13 25.13,13.25 24.91,13.47 15.71,13.47 14.76,12.52 14.76,12.09 14.25,11.59 13.69,11.59 U4.B10
F0_CE3N: length 16.7
  TOP w0.076: v1(27.12,10.19) 26.69,10.62 26.24,10.62 25.91,10.95 25.91,11.23 24.56,12.58 24.2,12.58 v1(23.83,12.95)
  BOTTOM w0.076: U4.A8 14.87,9.98 15.03,10.14 15.03,10.77 17.39,13.13 23.66,13.13 v1(23.83,12.95) ; U6.H12 v1(27.12,10.19)
F0_CE4N: length 18.6
  TOP w0.076: v1(25.52,8.59) 25.52,10.17 25.12,10.57 23.59,10.57 23.49,10.47 23.49,10.04 23.26,9.81 22.93,9.81 22.71,10.04 22.71,10.39 20.22,12.88 15.86,12.88 v1(15.84,12.9)
  BOTTOM w0.076: U4.B8 13.72,10.32 14.65,10.32 14.81,10.47 14.81,11.41 15.29,11.89 15.29,12.5 15.68,12.9 v1(15.84,12.9) ; U6.K10 v1(25.52,8.59)
F0_CE5N: length 16.7
  TOP w0.076: v1(23.22,12.46) 23.21,12.46 23.21,12.45 23.49,12.45 23.79,12.16 24.27,12.16 25.5,10.93 25.5,10.6 25.98,10.11 25.98,9.73 v1(26.32,9.39)
  BOTTOM w0.076: U6.J11 v1(26.32,9.39) ; U4.A7 15.16,9.33 15.52,9.68 15.52,10.7 17.61,12.79 17.63,12.79 17.63,12.79 22.87,12.79 23.21,12.46 v1(23.22,12.46)
F0_CE6N: length 16.4
  BOTTOM w0.076: U4.B7 13.74,9.68 15.03,9.68 15.31,9.96 15.31,10.77 17.47,12.93 17.52,12.93 17.54,12.95 17.56,12.95 17.56,12.96 23.25,12.96 23.58,12.62 24.66,12.62 24.74,12.55 24.74,10.19 U6.K12
F0_CE7N: length 17.1
  TOP w0.076: v1(22.1,12.43) 22.1,12.78 22.43,13.11 23.16,13.11 23.9,12.37 24.43,12.37 25.73,11.08 25.73,10.72 26.26,10.19 v1(26.32,10.19)
  BOTTOM w0.076: U4.A6 14.77,8.68 15.77,9.68 15.77,10.7 17.7,12.63 21.9,12.63 v1(22.1,12.43) ; U6.J12 v1(26.32,10.19)
F0_CLE: length 25.5
  ART03 w0.089: v1(24.74,3.8) 24.31,3.37 24.31,2.93 24,2.62 23.77,2.62 23.34,2.19 20.7,2.19 20.22,2.67 18.21,2.67 17.82,3.07 16.7,3.07 16.18,3.59 16.18,4.25 14.68,5.74 14.68,7.57 13.97,8.29 12.37,8.29 11.99,8.67 9.7,8.67 9.08,9.29 8.85,9.29 8.47,9.67 8.47,10.99 v1(7.87,11.59)
  BOTTOM w0.076: U6.K5 v1(24.74,3.8) 24.35,4.2 U6.L5 ; U4.K10 v1(7.87,11.59)
F0_DQS: length 40.8
  ART03 w0.089: v1(28.72,5.4) 28.51,5.19 28.51,1.57 27.3,0.36 15.17,0.36 13.94,1.58 9.65,1.58 8.57,2.65 8.57,4 8.18,4.4 5.69,4.4 4.85,5.24 4.85,11.76 v1(4.62,11.99)
  BOTTOM w0.076: U6.F7 v1(28.72,5.4) 28.72,5.39 U6.F6 ; U4.N10 6.19,11.32 5.22,11.32 4.62,11.92 v1(4.62,11.99)
F0_DQSN: length 40.6
  ART03 w0.089: v1(5.04,12.21) 5.13,12.12 5.13,5.33 5.8,4.67 8.29,4.67 8.84,4.11 8.84,2.76 9.76,1.84 14.05,1.84 15.28,0.62 27.19,0.62 28.24,1.68 28.24,5.08 v1(27.92,5.4)
  BOTTOM w0.076: v1(5.04,12.21) 5.04,11.88 5.33,11.59 6.57,11.59 U4.M10 ; U6.G6 27.53,5.01 v1(27.92,5.4) U6.G7
F0_IO0: length 33.2
  ART04 w0.089: v1(7.87,12.24) 8.2,11.91 8.2,11.08 8.84,10.44 8.84,10.16 9.02,9.98 9.93,9.98 9.95,10 11.88,10 12.06,10.18 12.74,10.18 12.92,10 13.18,10 13.36,10.19 16.56,10.19 16.63,10.11 16.63,9.48 17.09,9.02 17.73,9.02 17.85,8.89 17.85,7.95 19.58,6.23 19.58,5.67 20.37,4.88 20.37,4.39 20.53,4.22 21.64,4.22 22.15,4.73 22.55,4.73 22.64,4.64 22.64,4.44 22.73,4.35 22.91,4.35 22.99,4.44 22.99,4.64 23.08,4.73 23.26,4.73 23.35,4.64 23.35,4.44 23.44,4.35 23.62,4.35 23.71,4.44 23.71,4.64 23.79,4.73 24.05,4.73 24.45,4.34 25.31,4.34 25.77,4.79 29.59,4.79 29.92,5.12 29.92,5.5 30.31,5.89 30.64,5.89 v1(31.12,5.4)
  BOTTOM w0.076: U6.C7 v1(31.12,5.4) 30.73,5.01 U6.C6 ; U4.K11 v1(7.87,12.24)
F0_IO1: length 32.9
  ART04 w0.089: v1(7.22,12.24) 7.56,11.9 7.56,11.46 7.98,11.04 7.98,10.13 8.78,9.33 14.05,9.33 14.7,9.99 16.32,9.99 16.46,9.85 16.46,9.35 17.19,8.62 17.19,7.57 18.84,5.92 18.84,5.14 20.57,3.41 21.16,3.41 21.31,3.56 21.84,3.56 22.4,4.12 25.52,4.12 25.96,4.55 29.82,4.55 30.2,4.93 30.66,4.93 30.76,5.03 30.76,5.26 30.62,5.4 v1(30.32,5.4)
  BOTTOM w0.076: U4.L11 v1(7.22,12.24) ; U6.D6 29.93,5.01 v1(30.32,5.4) U6.D7
F0_IO2: length 33.5
  ART04 w0.089: v1(8.51,12.25) 8.83,11.92 8.83,11.35 8.93,11.26 9.32,11.26 9.47,11.1 9.47,10.77 9.62,10.62 10.03,10.62 10.06,10.65 13.31,10.65 13.41,10.55 16.77,10.55 16.86,10.46 16.86,9.58 17.17,9.28 17.75,9.28 18.03,9 18.03,8.08 20.11,6 20.11,5.49 20.67,4.93 24.2,4.93 24.56,4.58 24.94,4.58 25.42,5.06 27.38,5.06 27.56,5.24 27.56,5.69 27.88,6.01 28,6.01 28.14,5.87 28.27,5.87 28.4,6 28.4,6.13 28.25,6.27 28.25,6.39 28.57,6.71 28.83,6.71 28.92,6.62 28.92,5.91 29,5.82 29.18,5.82 29.27,5.91 29.27,6.62 29.36,6.71 29.84,6.71 29.97,6.58 29.97,6.13 29.52,5.68 v1(29.52,5.4)
  BOTTOM w0.076: v1(8.51,12.25) 9.16,12.25 U4.H11 ; U6.E6 29.13,5.01 v1(29.52,5.4) U6.E7
F0_IO3: length 34
  ART04 w0.089: v1(8.52,13.52) 8.52,13.52 8.22,13.21 7.06,13.21 6.88,13.03 6.88,10.85 8.61,9.12 9.85,9.12 10.31,8.67 13.89,8.67 14.98,9.76 16.1,9.76 16.25,9.61 16.25,8.21 17.98,6.48 17.98,5.24 18.97,4.25 19.3,4.25 20.34,3.21 20.34,2.7 20.88,2.16 22.6,2.16 23.04,2.6 27.28,2.6 27.56,2.87 27.56,3.44 v1(27.92,3.8)
  BOTTOM w0.076: U6.G5 v1(27.92,3.8) 28.32,4.2 U6.F5 ; v1(8.52,13.52) 8.81,13.23 U4.J13
F0_IO4: length 33.2
  ART04 w0.089: v1(30.32,8.59) 29.97,8.94 29.97,12.26 29.32,12.91 25.99,12.91 24.42,11.33 22.1,11.33 21.77,11.66 21.77,12.73 21.68,12.82 19.87,12.82 19.78,12.91 19.78,13.09 19.87,13.18 21.68,13.18 21.77,13.27 21.77,13.49 21.61,13.65 15.53,13.65 15.07,13.19 9.49,13.19 v1(9.17,13.52)
  BOTTOM w0.076: v1(9.17,13.52) 9.46,13.23 U4.H13 ; U6.D11 29.93,8.98 v1(30.32,8.59) U6.D10
F0_IO5: length 33.2
  ART03 w0.109: v1(9.82,13.52) 10.16,13.17 15.06,13.17 15.49,13.61 24.78,13.61 24.89,13.5 24.89,13.07 25,12.96 25.22,12.96 25.33,13.07 25.33,13.5 25.44,13.61 25.66,13.61 25.77,13.5 25.77,13.07 25.87,12.96 26.09,12.96 26.2,13.07 26.2,13.49 26.31,13.6 26.53,13.6 26.64,13.49 26.64,13.07 26.75,12.96 26.97,12.96 27.08,13.07 27.08,13.48 27.18,13.59 27.4,13.59 27.51,13.48 27.51,13.07 27.62,12.96 27.84,12.96 27.95,13.07 27.95,13.49 28.06,13.6 28.34,13.6 28.44,13.49 28.44,13.12 28.55,13.01 28.77,13.01 28.88,13.12 28.88,13.5 28.99,13.61 29.78,13.61 29.89,13.5 29.89,13.25 29.78,13.14 29.34,13.14 29.23,13.03 29.23,12.81 29.34,12.7 29.78,12.7 29.89,12.6 29.89,8.96 v1(29.52,8.59)
  BOTTOM w0.076: v1(9.82,13.52) 10.11,13.23 U4.G13 ; U6.E11 29.13,8.98 v1(29.52,8.59) U6.E10
F0_IO6: length 33.1
  ART04 w0.089: v1(9.82,12.24) 10.29,12.24 11.28,11.26 12.82,11.26 13.59,12.02 15.9,12.02 16.03,12.15 16.53,12.15 16.62,12.23 16.62,12.77 16.71,12.86 16.89,12.86 16.98,12.77 16.98,12.23 17.06,12.15 17.24,12.15 17.33,12.23 17.33,12.77 17.42,12.86 17.6,12.86 17.69,12.77 17.69,12.23 17.78,12.15 17.95,12.15 18.04,12.23 18.04,12.77 18.13,12.86 18.31,12.86 18.4,12.77 18.4,12.29 18.72,11.97 18.72,11.23 20.5,9.45 20.5,9.24 20.58,9.15 21.17,9.15 21.26,9.06 21.26,8.88 21.17,8.79 20.58,8.79 20.5,8.7 20.5,8.28 20.62,8.16 21.95,8.16 22.03,8.25 22.03,9.09 22.12,9.17 22.3,9.17 22.39,9.09 22.39,8.25 22.48,8.16 23.64,8.16 23.73,8.25 23.73,9.26 23.82,9.35 24,9.35 24.09,9.26 24.09,8.25 24.17,8.16 28.29,8.16 v1(28.72,8.59)
  BOTTOM w0.076: U6.F10 v1(28.72,8.59) 28.33,8.98 U6.F11 ; U4.G11 v1(9.82,12.24)
F0_IO7: length 33.5
  ART04 w0.089: v1(9.82,12.87) 9.85,12.89 10.53,12.89 10.87,12.55 14.75,12.55 15.59,13.39 19.28,13.39 19.45,13.21 19.45,12.6 19.56,12.5 21.08,12.5 21.21,12.37 21.21,10.74 21.35,10.6 24.28,10.6 26.19,12.5 26.7,12.5 26.79,12.41 26.79,11.24 26.88,11.16 27.06,11.16 27.15,11.24 27.15,12.11 27.24,12.2 28.9,12.2 29.11,11.99 29.11,10.77 28.95,10.62 27.61,10.62 27.48,10.49 27.48,9.99 27.63,9.83 29,9.83 29.11,9.73 29.11,9.48 29.02,9.39 v1(27.92,9.39)
  BOTTOM w0.076: U6.G12 27.53,9.78 v1(27.92,9.39) U6.G11 ; U4.G12 10.11,12.58 v1(9.82,12.87)
F0_RE: length 41.1
  ART03 w0.089: v1(24.74,5.4) 26.5,5.4 27.53,4.37 27.53,1.45 26.9,0.82 25.17,0.82 24.94,1.05 20.32,1.05 19.96,1.4 15.18,1.4 14.27,2.32 10.03,2.32 9.32,3.03 9.32,5.44 8.91,5.85 5.97,5.85 5.38,6.43 5.38,12.45 5.15,12.68 v1(5.03,12.68)
  BOTTOM w0.076: U4.N12 5.13,12.58 v1(5.03,12.68) ; U6.L7 24.35,5.8 v1(24.74,5.4) U6.K7
F0_REN: length 39.3
  ART03 w0.089: v1(24.74,4.91) 26.16,4.91 26.79,4.27 26.79,1.81 26.06,1.07 25.25,1.07 25.04,1.27 20.39,1.27 20.01,1.66 15.22,1.66 14.36,2.52 10.11,2.52 9.55,3.08 9.55,5.54 9.01,6.08 6.1,6.08 5.64,6.54 5.64,12.68 5.28,13.03 v1(5.28,13.09)
  BOTTOM w0.076: U6.L6 24.35,5 24.44,4.91 v1(24.74,4.91) 25.04,4.91 U6.K6 ; U4.M12 6.55,12.91 5.46,12.91 v1(5.28,13.09)
F0_WEN: length 22.5
  ART04 w0.089: v1(9.17,12.87) 9.19,12.87 9.51,12.55 10.34,12.55 10.97,11.92 13.21,11.92 13.54,12.25 15.67,12.25 16.53,13.11 19.09,13.11 19.17,13.02 19.17,11.31 20.7,9.78 25.13,9.78 v1(26.32,8.59)
  BOTTOM w0.076: U4.H12 9.46,12.58 v1(9.17,12.87) ; U6.J10 v1(26.32,8.59) 26.72,8.2 U6.H10
F1_ALE: length 12.4
  TOP w0.076: v1(23.14,10.99) 22.42,10.99 20.2,13.21 15.49,13.21 15.16,12.88 14.17,12.88 v1(13.54,13.52)
  BOTTOM w0.076: U6.M13 v1(23.14,10.99) 22.75,10.6 U6.N13 ; U4.B13 13.54,13.38 v1(13.54,13.52)
F1_CE0N: length 11.1
  BOTTOM w0.076: U6.N6 23.16,5.43 23.16,5.97 22.81,6.33 22.58,6.33 21.13,7.78 16.1,7.78 15.85,8.03 U4.A5
F1_CE1N: length 10.1
  ART03 w0.089: v1(20.74,4.6) 20.74,4.84 20.04,5.54 20.04,6.15 19.15,7.04 v1(19.15,7.45)
  BOTTOM w0.076: v1(19.15,7.45) 19.12,7.47 19.12,7.5 19.05,7.57 16.03,7.57 15.87,7.73 13.68,7.73 U4.B5 ; U6.R6 v1(20.74,4.6)
F1_CE2N: length 13.2
  ART03 w0.089: v1(23.12,3) 21.91,4.22 21.23,4.22 21.11,4.35 21.11,5.74 21,5.85 20.42,5.85 20.22,6.05 20.22,6.41 19.66,6.96 v1(19.66,7.45)
  BOTTOM w0.076: v1(19.66,7.45) 19.35,7.14 19,7.14 18.77,7.37 15.97,7.37 15.8,7.55 14.2,7.55 U4.A4 ; U6.N4 v1(23.12,3)
F1_CE3N: length 14.6
  ART03 w0.089: v1(20.22,7.47) 20.24,7.5 20.24,7.74 20.13,7.85 18.9,7.85 18.79,7.74 18.79,7.09 19.84,6.05 19.84,5.39 20.27,4.96 20.27,4.28 v1(20.74,3.8)
  BOTTOM w0.076: U4.B4 13.69,7.07 14.15,7.07 14.45,7.37 15.67,7.37 15.87,7.17 18.72,7.17 18.92,6.96 19.66,6.96 20.17,7.47 v1(20.22,7.47) ; U6.R5 v1(20.74,3.8)
F1_CE4N: length 9.6
  BOTTOM w0.076: U6.N7 22.73,5.92 21.93,6.72 20.48,6.72 20.39,6.63 19.54,6.63 19.48,6.68 18.84,6.68 18.57,6.96 15.82,6.96 15.62,7.17 14.68,7.17 14.24,6.73 U4.A3
F1_CE5N: length 11.1
  BOTTOM w0.076: U4.B3 13.7,6.41 14.22,6.41 14.76,6.94 15.57,6.94 15.72,6.79 18.39,6.79 18.64,6.53 18.76,6.53 18.78,6.52 19.42,6.52 19.61,6.33 20.34,6.33 20.57,6.56 21.82,6.56 22.31,6.06 22.31,5.38 U6.P6
F1_CE6N: length 14.5
  ART03 w0.089: v1(23.12,3.8) 23.21,3.8 23.52,3.49 23.52,2.86 23.31,2.65 22.71,2.65 22.48,2.87 21.21,2.87 20.95,2.62 20.62,2.62 20.39,2.85 20.39,3.15 20.15,3.4 16.75,3.4 16.43,3.71 16.43,4.32 15.21,5.54 15.21,6.44 v1(15.19,6.46)
  BOTTOM w0.076: U4.A2 14.14,5.97 14.86,5.97 15.21,6.33 15.21,6.44 v1(15.19,6.46) ; U6.N5 v1(23.12,3.8)
F1_CE7N: length 11.4
  ART03 w0.089: v1(21.61,3.89) 21.61,3.88 21.2,3.46 20.55,3.46 19.78,4.22 18.95,4.22 18.77,4.04 17.12,4.04 16.13,5.03 16.13,5.97 15.7,6.41 v1(15.7,6.46)
  BOTTOM w0.076: U4.B2 13.71,5.74 15.16,5.74 15.64,6.23 15.64,6.41 v1(15.7,6.46) ; U6.P5 21.63,3.89 v1(21.61,3.89)
F1_CLE: length 14.8
  TOP w0.076: v1(14.96,13.52) 15.03,13.59 20.35,13.59 21.82,12.13 23.31,12.13 23.49,11.94 23.49,10.9 23.14,10.55 v1(23.14,10.19)
  BOTTOM w0.076: U4.B11 13.68,12.22 14.17,12.22 14.35,12.4 14.35,12.6 14.96,13.21 v1(14.96,13.52) ; U6.M12 v1(23.14,10.19) 22.75,9.8 U6.N12
F1_DQS: length 15.5
  ART04 w0.076: v1(8.52,12.87) 8.55,12.89 8.68,12.89 9.66,11.9 9.99,11.9 10.13,11.76 10.13,11.43 10.49,11.08 12.95,11.08 13.53,11.66 17.68,11.66 17.96,11.38 17.96,10.02 18.92,9.05 18.92,8.85 19.08,8.69 v1(19.27,8.69)
  BOTTOM w0.076: U4.J12 8.81,12.58 v1(8.52,12.87) ; U6.U10 19.53,8.42 v1(19.27,8.69) 19.53,8.95 U6.U11
F1_DQSN: length 17.2
  ART04 w0.076: v1(20.07,8.69) 19.71,8.34 19.07,8.34 18.67,8.74 18.67,8.95 17.7,9.91 17.7,11.28 17.57,11.41 13.64,11.41 13.05,10.82 10.38,10.82 9.95,11.26 9.68,11.26 9.47,11.46 9.47,11.74 8.65,12.56 8.18,12.56 7.87,12.86 v1(7.87,12.87)
  BOTTOM w0.076: v1(7.87,12.87) 8.16,12.58 U4.K12 ; U6.T11 20.07,8.73 v1(20.07,8.69) 20.33,8.42 U6.T10
F1_IO0: length 14.8
  TOP w0.076: v1(11.09,12.86) 11.1,12.86 11.1,12.65 11.2,12.55 11.91,12.55 12.08,12.38 12.08,12 12.18,11.9 12.62,11.9 13.13,11.38 14.63,11.38 14.88,11.64 16.08,11.64 16.38,11.33 16.38,10.57 16.53,10.42 16.69,10.42 16.74,10.47 16.74,10.62 16.81,10.7 17.04,10.7 17.4,10.34 17.4,9.96 17.6,9.76 17.6,9.17 17.17,8.74 17.17,8.06 17.09,7.98 16.25,7.98 16.15,8.08 16.15,8.26 16.48,8.59 v1(16.74,8.59)
  BOTTOM w0.076: v1(11.09,12.86) 11.06,12.86 10.78,12.58 U4.F12 ; U6.Y10 v1(16.74,8.59) 17.13,8.98 U6.Y11
F1_IO1: length 14.9
  TOP w0.076: v1(13.05,12.22) 13.22,12.22 13.38,12.07 13.38,11.99 13.32,11.94 13.18,11.94 13.1,11.87 13.1,11.71 13.21,11.61 13.69,11.61 13.76,11.69 13.76,12.06 13.84,12.14 13.98,12.14 14.07,12.04 14.07,11.69 14.15,11.61 14.3,11.61 14.37,11.69 14.37,12.04 14.5,12.17 14.7,12.17 14.78,12.09 14.78,11.92 14.86,11.84 15.01,11.84 15.09,11.92 15.09,12.09 15.16,12.17 15.31,12.17 15.39,12.09 15.39,11.92 15.47,11.84 15.62,11.84 15.7,11.92 15.7,12.09 15.77,12.17 15.92,12.17 16,12.09 16,11.92 16.08,11.84 16.23,11.84 16.3,11.92 16.3,12.09 16.38,12.17 17.27,12.17 17.37,12.07 17.37,11.87 17.3,11.79 16.61,11.79 16.53,11.71 16.53,11.56 16.61,11.49 17.3,11.49 17.37,11.41 17.37,10.8 17.6,10.57 17.6,10.01 17.78,9.83 17.78,8.83 v1(17.54,8.59)
  BOTTOM w0.076: v1(13.05,12.22) 13.05,12.22 13.05,12.22 13.02,12.22 U4.C11 ; U6.W10 v1(17.54,8.59) 17.93,8.98 U6.W11
F1_IO2: length 14.8
  TOP w0.076: v1(11.09,13.52) 11.1,13.51 11.1,13.29 11.18,13.21 11.96,13.21 12.08,13.1 12.08,12.73 12.26,12.55 13.17,12.55 13.34,12.38 17.54,12.38 17.8,12.12 17.8,11.91 17.73,11.83 17.66,11.83 17.58,11.76 17.58,11.61 17.66,11.53 17.73,11.53 17.8,11.45 17.8,11.3 17.73,11.22 17.66,11.22 17.58,11.15 17.58,11 17.66,10.92 17.73,10.92 17.8,10.84 17.8,10.06 17.96,9.91 17.96,9.67 18.03,9.59 18.13,9.59 18.21,9.51 18.21,9.36 18.13,9.29 18.03,9.29 17.96,9.21 17.96,8.26 18.06,8.16 18.29,8.16 18.36,8.23 v1(18.36,8.59)
  BOTTOM w0.076: U4.F13 10.8,13.23 v1(11.09,13.52) ; U6.V10 18.71,8.2 18.36,8.54 v1(18.36,8.59) 18.37,8.59 18.73,8.95 U6.V11
F1_IO3: length 15.7
  TOP w0.076: v1(19.94,9.4) 19.71,9.17 19.71,7.93 19.56,7.78 19.17,7.78 18.82,8.13 18.82,8.67 18.44,9.05 18.44,9.73 18.01,10.16 18.01,12.22 17.68,12.54 13.52,12.54 13.37,12.7 13.37,13.13 13.28,13.21 12.27,13.21 11.96,13.52 v1(11.74,13.52)
  BOTTOM w0.076: U6.T12 19.94,9.4 v1(19.94,9.4) 19.54,9.8 U6.U12 ; v1(11.74,13.52) 11.45,13.23 U4.E13
F1_IO4: length 14.8
  ART03 w0.089: v1(17.57,5.41) 17.52,5.47 17.52,6.74 17.26,7 17.26,7.13 17.58,7.45 17.58,7.57 17.45,7.7 17.32,7.7 17.01,7.38 16.88,7.38 16.75,7.51 16.75,7.63 17.07,7.95 17.07,8.08 16.95,8.2 16.82,8.2 16.5,7.88 16.38,7.88 15.97,8.29 15.97,8.87 14.6,10.24 13.56,10.24 13.08,10.72 12.77,10.72 12.06,11.43 12.06,12.4 12.2,12.54 12.73,12.54 13.03,12.84 v1(13.03,12.85)
  BOTTOM w0.076: U6.W7 17.57,5.44 v1(17.57,5.41) 17.93,5.06 U6.W6 ; U4.C12 12.73,12.59 13,12.85 v1(13.03,12.85)
F1_IO5: length 15.4
  ART03 w0.089: v1(12.38,12.85) 12.16,12.85 11.86,12.55 11.52,12.55 11.43,12.47 11.43,11.43 12.34,10.52 12.34,9.55 12.57,9.33 14.07,9.33 17.04,6.35 17.04,4.98 17.45,4.58 18.08,4.58 18.39,4.88 v1(18.39,5.36)
  BOTTOM w0.076: U4.D12 12.08,12.59 12.35,12.85 v1(12.38,12.85) ; U6.V6 18.41,5.36 v1(18.39,5.36) 18.41,5.39 18.41,5.47 U6.V7
F1_IO6: length 15.7
  ART03 w0.089: v1(11.1,12.24) 11.1,11.44 12.09,10.44 12.09,9 12.55,8.54 14.32,8.54 16.38,6.48 16.38,5.19 17.27,4.3 18.64,4.3 19.2,4.86 v1(19.2,5.36)
  BOTTOM w0.076: U6.U7 19.2,5.46 v1(19.2,5.36) 19.2,5.34 U6.U6 ; U4.F11 v1(11.1,12.24)
F1_IO7: length 15.5
  ART03 w0.089: v1(19.94,4.6) 19.56,4.99 19.56,5.52 19.33,5.74 18.23,5.74 17.96,5.47 17.96,5.12 17.87,5.03 17.33,5.03 17.24,5.12 17.24,6.59 13.84,9.99 12.85,9.99 12.55,10.29 12.55,10.67 11.75,11.47 11.75,12.21 v1(11.74,12.22)
  BOTTOM w0.076: U6.T6 v1(19.94,4.6) 20.33,4.21 U6.T5 ; v1(11.74,12.22) 11.72,12.22 U4.E11
F1_RE: length 39.2
  ART03 w0.089: v1(23.14,8.59) 23.37,8.59 24.46,7.5 24.46,6.43 24.23,6.2 24.23,4.68 24.53,4.37 25.12,4.37 25.63,3.87 25.63,2.39 24.91,1.68 20.55,1.68 19.96,2.27 17.96,2.27 17.65,2.57 16.49,2.57 16.07,2.99 14.73,2.99 13.66,4.06 10.25,4.06 10.03,4.28 10.03,5.82 9.22,6.63 6.68,6.63 6.17,7.15 6.17,12.47 7.22,13.52 v1(7.22,13.52)
  BOTTOM w0.076: v1(7.22,13.52) 7.22,13.51 7.51,13.23 U4.L13 ; U6.N10 22.74,8.2 v1(23.14,8.59) 23.24,8.49 U6.M10
F1_REN: length 40.7
  ART03 w0.089: v1(23.14,9.39) 24.71,7.82 24.71,6.15 24.41,5.85 24.41,4.78 24.61,4.58 25.27,4.58 25.91,3.94 25.91,2.29 25.09,1.48 20.44,1.48 20.06,1.86 16.72,1.86 15.81,2.77 14.63,2.77 13.52,3.88 10.11,3.88 9.83,4.16 9.83,5.64 9.12,6.35 6.6,6.35 5.92,7.04 5.92,12.59 6.57,13.24 v1(6.57,13.52)
  BOTTOM w0.076: U4.M13 6.86,13.23 6.57,13.51 v1(6.57,13.52) ; U6.M11 v1(23.14,9.39) 22.75,9 U6.N11
F1_WEN: length 17.9
  ART03 w0.089: v1(21.54,4.6) 21.31,4.83 21.31,7.14 20.93,7.52 20.93,9.61 19.86,10.67 15.14,10.67 14.93,10.47 13.69,10.47 13.31,10.85 13.31,11.33 12.42,12.22 v1(12.39,12.22)
  BOTTOM w0.076: U4.D11 12.37,12.22 v1(12.39,12.22) ; U6.P7 U6.R7 21.13,5.79 21.54,5.39 v1(21.54,4.6)
F_R/B: length 42.4
  TOP w0.254: R23.2 26.36,11.83 v1(26.32,11.79)
  ART03 w0.203: v1(26.32,10.99) v1(26.32,11.79) 26.32,12.2 26.02,12.5 23.68,12.5 22.91,13.28 15.56,13.28 15.17,12.89 13.74,12.89 13.7,12.85 v1(13.68,12.85)
  ART04 w0.203: v1(26.32,10.99) 26.72,10.6 26.72,9.2 26.92,9 28.93,9 29.13,8.79 29.13,8.39 29.46,8.06 30.5,8.06 30.73,7.83 30.73,7.19 30.42,6.88 30.42,6.6 30.63,6.39 30.67,6.39 31.57,5.49 31.57,4.45 31.34,4.22 27.48,4.22 26.67,3.41 22.35,3.41 21.99,3.04 21.7,3.04 21.54,3.2 ; v1(21.54,3.2) 21.54,3.2 ; 21.54,3.2 21.54,2.52 v1(21.54,2.52)
  BOTTOM w0.305: v1(13.68,12.85) 13.66,12.85 U4.B12 ; v1(21.54,3.2) 21.74,3.2 U6.P4 ; U6.J14 v1(26.32,11.79) ; v1(21.54,2.52) 21.86,2.52 U6.P3 ; U6.J13 v1(26.32,10.99)
  BOTTOM w0.33: v1(21.54,3.2) v1(21.54,2.52)
  BOTTOM w0.381: v1(21.54,2.52) 21.22,2.52 21.15,2.6 U6.R3 ; v1(26.32,10.99) 26.72,10.6 U6.H13 ; v1(21.54,3.2) 21.34,3.2 21.15,3.4 U6.R4 ; v1(26.32,11.79) 26.72,11.4 U6.H14
F_WPN: length 25.1
  TOP w0.076: v1(14.49,13.51) 14.49,13.27 14.65,13.11 15.11,13.11 15.39,13.39 20.29,13.39 22.21,11.47 22.83,11.47 v1(23.14,11.79)
  ART03 w0.089: v1(23.14,11.79) 22.66,11.3 22.66,8.56 23.26,7.95 23.54,7.95 24.23,7.27 24.23,6.61 23.98,6.35 23.98,4.58 24.41,4.14 24.99,4.14 25.22,3.92 25.22,2.68 v1(24.74,2.2)
  BOTTOM w0.076: U6.K3 v1(24.74,2.2) 24.35,2.6 U6.L3 ; U6.M14 v1(23.14,11.79) 22.75,11.4 U6.N14 ; U4.A12 14.03,12.79 14.37,13.14 14.37,13.4 v1(14.49,13.51)
FB1: length 1.5
  TOP w0.203: R16.1 R14.1 23.49,4.12 U5.14
FB2: length 2
  TOP w0.178: U5.3 23.09,8.12 22.57,8.63 R17.1
  TOP w0.203: R17.1 22.57,9.5 R15.1
FB3: length 5.6
  TOP w0.178: R20.1 23.6,8.52 23.49,8.41 U5.2
  TOP w0.203: R19.1 26.87,8.39 26.67,8.18 25.32,8.18 25.12,8.39 25.12,8.74 24.89,8.97 24.56,8.97 24.48,9.05 23.83,9.05 23.6,8.82 R20.1
